# Altium PCB PCB2.PcbDoc
Units mil, origin at the board's own origin, x right, y up, seen from the top; angles counter-clockwise.
Board outline 1525 x 1550 mil, 2 copper layers (Top Layer, Bottom Layer); 17 components, 16 nets, 60 pads, 14 vias.
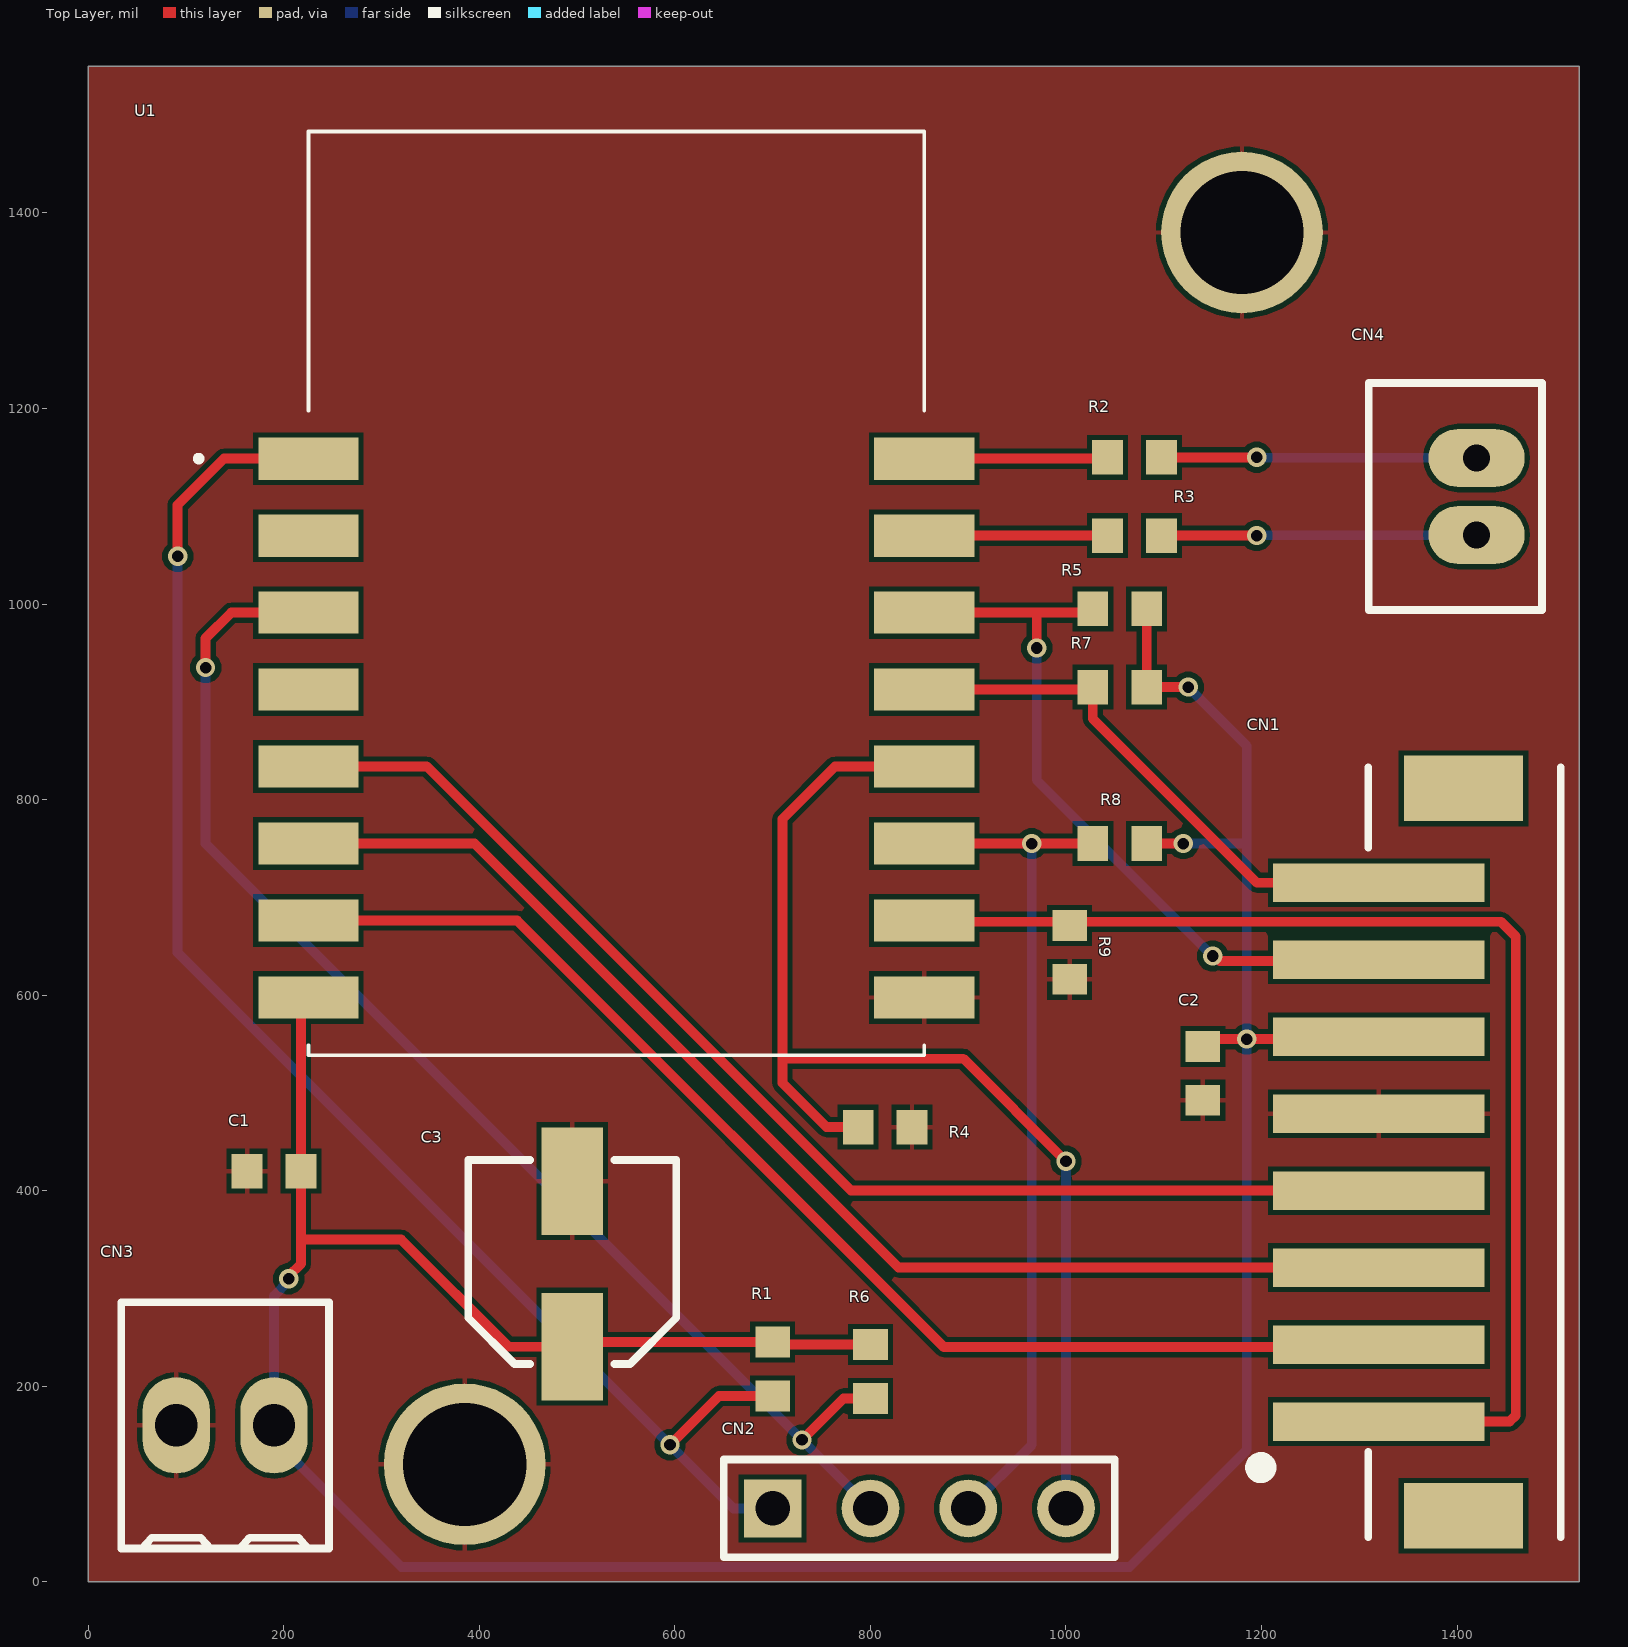
[diagram p0: Top Layer view]
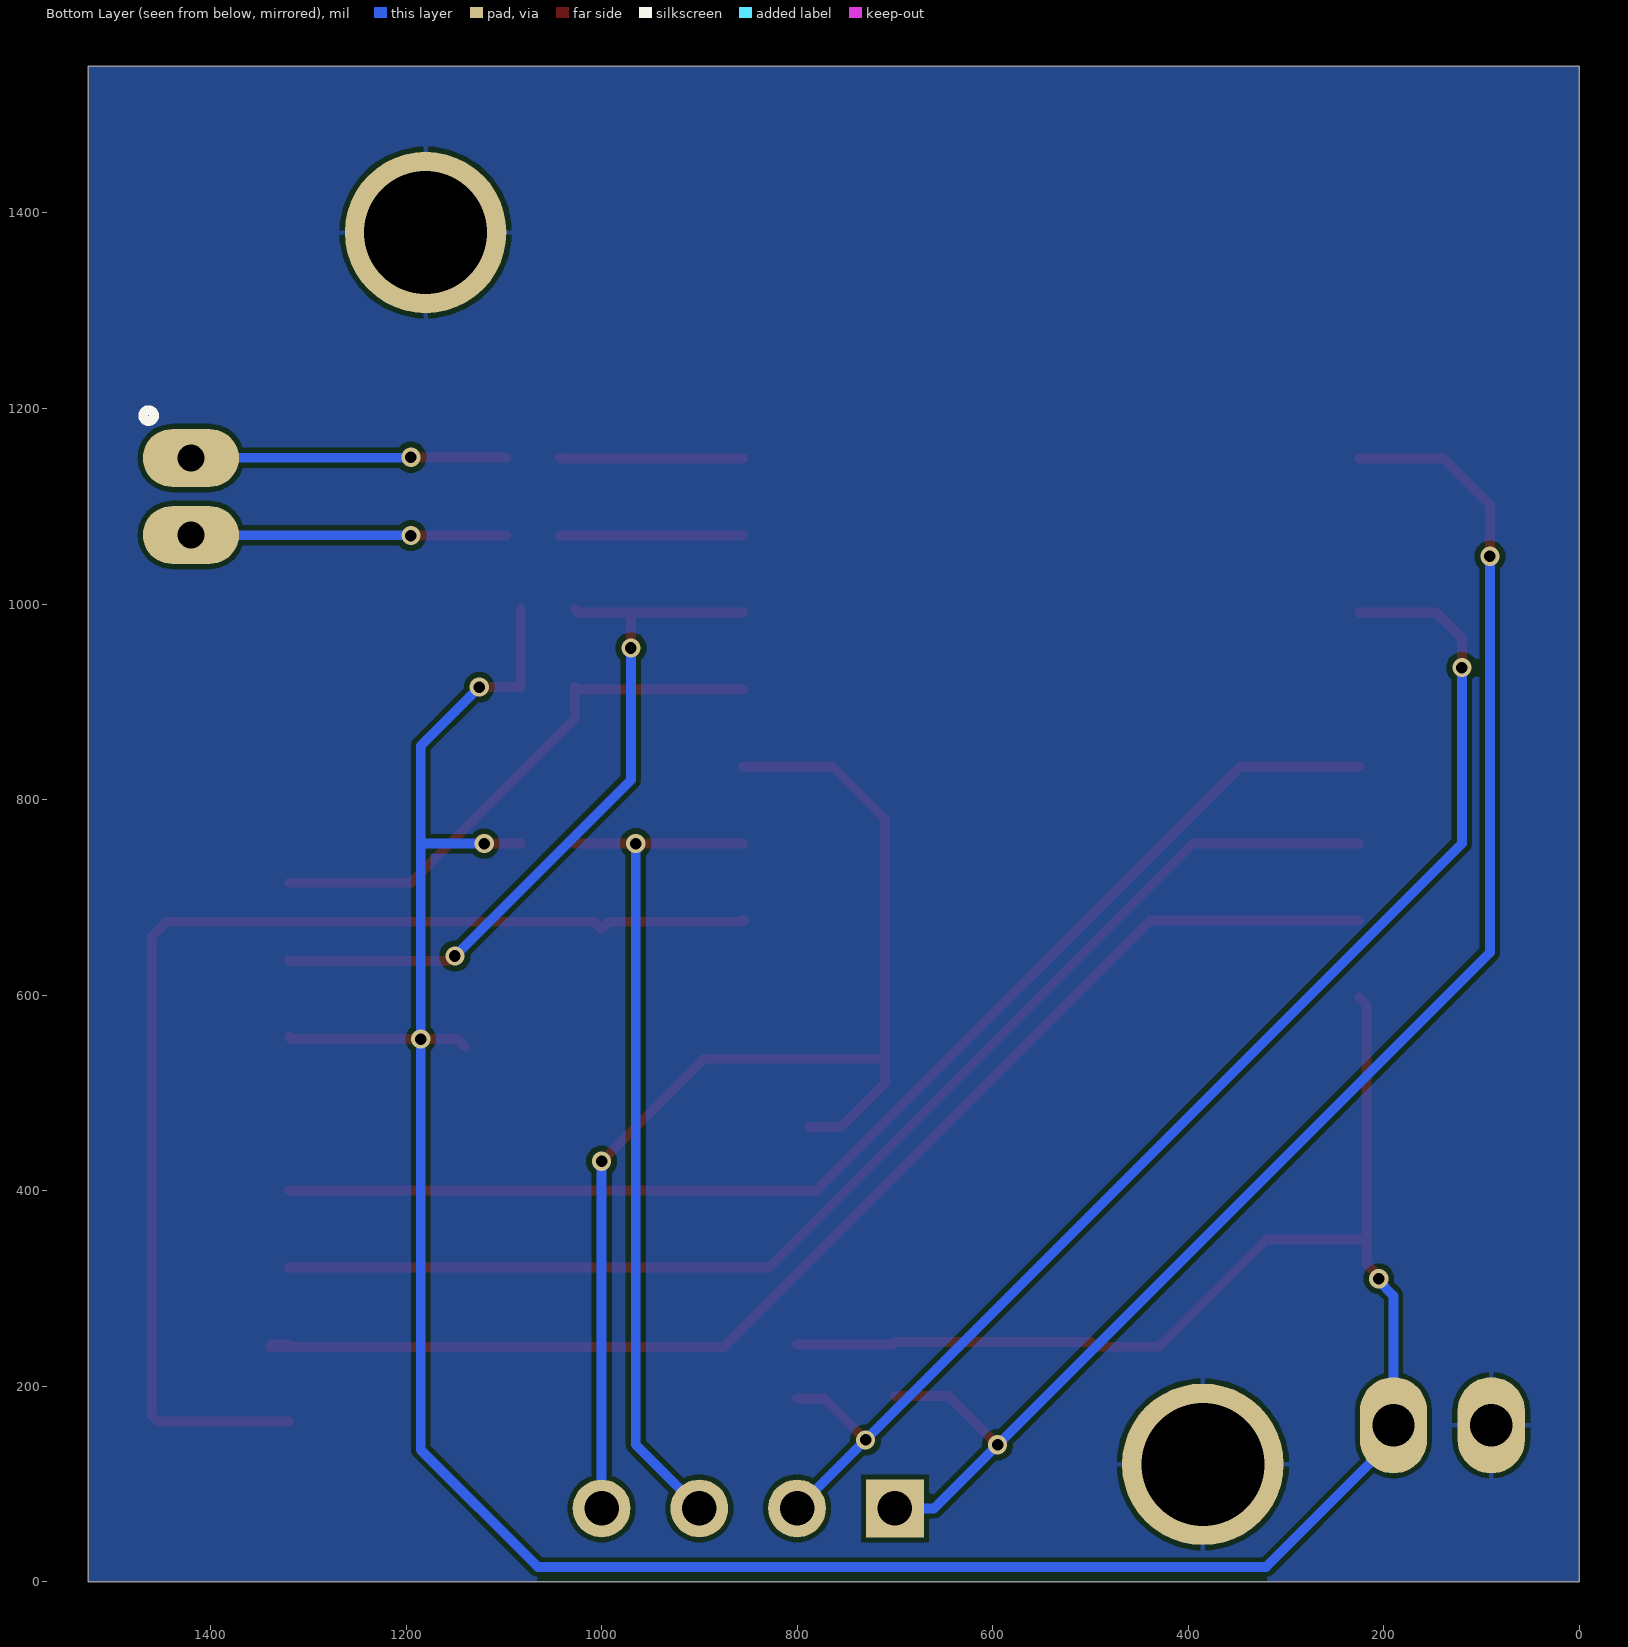
[diagram p1: Bottom Layer view, seen from below]

## Layer stack, top to bottom
Top Solder: solder mask 0.4, Solder Resist, Dk 3.5
Top Layer: signal copper 1.4
Dielectric 1: dielectric 12.6, FR-4, Dk 4.8
Bottom Layer: signal copper 1.4
Bottom Solder: solder mask 0.4, Solder Resist, Dk 3.5

## Board outline
0,0 0,1550 1525,1550 1525,260 1525,0

## Design rules (kind name [scope] priority, off if disabled: settings)
BoardOutlineClearance [All] p1: gap=7.87 ignorepadtopadclearanceinfootprint=FALSE
Clearance [All] p1: gap=5 ignorepadtopadclearanceinfootprint=FALSE except(9.84: Arc-Hole Track-Hole SMDPad-Hole THPad-Hole Via-Hole Fill-Hole Poly-Hole Region-Hole Text-Hole)
ComponentClearance [All] p1: gap=5 collisioncheckmode=3 verticalgap=5 showdistances=TRUE
DiffPairsRouting [All] p1: maxlimit=10 minlimit=5 mostfreqgap=5 toplayer_minwidth=5 toplayer_maxwidth=1000 toplayer_prefwidth=5 bottomlayer_minwidth=5 bottomlayer_maxwidth=1000 bottomlayer_prefwidth=5 maxuncoupledlength=500
Height [All] p1: minheight=0 maxheight=71497.94 prefheight=500
HoleSize [All] p1: absolutevalues=TRUE maxlimit=248.03 minlimit=5.91 maxpercent=80.000 minpercent=20.000
HoleToHoleClearance [All] p1: gap=19.68 allowstackedmicrovias=FALSE
MinimumAnnularRing [All] p1: minimumring=3
MinimumSolderMaskSliver [All] p1: minsoldermaskwidth=0
PlaneClearance [All] p1: clearance=5
PlaneConnect PlaneConnectPowerPads [InPadClass('PowerPads')] p1: planeconnectstyle=Direct reliefexpansion=20 reliefentries=4 reliefconductorwidth=10 reliefairgap=10
PlaneConnect [All] p2: pad.planeconnectstyle=Relief pad.reliefexpansion=11.81 pad.reliefentries=4 pad.reliefconductorwidth=5 pad.reliefairgap=5 via.planeconnectstyle=Direct via.reliefexpansion=11.81 via.reliefentries=4 via.reliefconductorwidth=5 via.reliefairgap=5
PolygonConnect PolygonConnectPowerPads [All vs (InPadClass('PowerPads'))] p1: connectstyle=Direct reliefconductorwidth=10 reliefentries=4 polygonreliefangle="90 Angle" airgapwidth=10
PolygonConnect [All] p2: thpad.connectstyle=Relief thpad.reliefconductorwidth=5 thpad.reliefentries=4 thpad.polygonreliefangle="90 Angle" thpad.airgapwidth=5 smdpad.connectstyle=Relief smdpad.reliefconductorwidth=5 smdpad.reliefentries=4 smdpad.polygonreliefangle="90 Angle" smdpad.airgapwidth=5 via.connectstyle=Direct via.reliefconductorwidth=5 via.reliefentries=4 via.polygonreliefangle="90 Angle" via.airgapwidth=5
RoutingVias [All] p1: holewidth=11.81 width=19.68 viastyle="Through Hole" minholewidth=11.81 minwidth=19.68 maxholewidth=11.81 maxwidth=19.68
SilkToSilkClearance [All] p1: silktosilkclearance=0
SilkToSolderMaskClearance [IsPad] p1: minsilkscreentomaskgap=5 clearancetoexposedcopper=TRUE
SolderMaskExpansion [All] p1: expansion=2.95 istentingtop=FALSE
Width [All] p1: maxlimit=1000 minlimit=5 preferedwidth=5 minimp=50.000000 maximp=50.000000 favimp=50.000000
20 further rules are at their usual default settings.

## Components (designator, comment, footprint, x,y, rotation, side; value= is the part's Value field where it differs from the comment)
C1 "Cap" 1608[0603] 190,420 r180 top value=100nF
C2 "Cap" 1608[0603] 1140,520 r270 top value=100nF
C3 "100µF" "CAP ALSMD POLY 5.3MM H6.0MM" 495,325 r90 top
CN1 "B8B-PH-SM4-TB_LF__SN_" B8B-PH-SM4-TB 1320,321.26 r270 top
CN2 "Header 4" HDR1X4 700,75 r0 top
CN3 "282834-2" "TE 282834-2" 140,160 r180 top
CN4 "B2B-PH-K-S(LF)(SN)" "JST B2B-PH-K" 1420,1110 r270 top
R1 "Res1" 1608[0603] 700,217.56 r90 top value=10k
R2 "Res1" 1608[0603] 1070,1150 r180 top value=100R
R3 "Res1" 1608[0603] 1070,1070 r180 top value=100R
R4 "Res1" 1608[0603] 815,465 r0 top value=10k
R5 "Res1" 1608[0603] 1055,995 r0 top value=4k7
R6 "Res1" 1608[0603] 800,215 r90 top value=10k
R7 "Res1" 1608[0603] 1055,915 r0 top value=4k7
R8 "Res1" 1608[0603] 1055,755 r0 top value=10k
R9 "Res1" 1608[0603] 1003.72,643.72 r270 top value=10k
U1 "ESP-12S" ESP12S 540.04,1010.94 r0 top

## Footprints (in the part's own frame and the unit in brackets; to place one, negate y for a bottom-side part, rotate by r counter-clockwise, add the part's x,y. Pads: shape width x height; smd on the part's side, far side on the other; paste and mask are expansions set on the pad)
1608[0603] [mm] "Chip Capacitor, Body 1.6x0.8mm, IPC High Density"
  rect 0.8x0.9 smd: 1(-0.7,0) 2(0.7,0)
  body extent -0.87,-0.48 0.87,0.48, height 1.3
B8B-PH-SM4-TB [mm]
  rect 1x5.5 smd: 1(4,0) 2(2,0) 3(0,0) 4(-2,0) 5(-4,0) 6(-6,0) 7(-8,0) 8(-10,0)
  rect 1.7x3.1 smd: 9(-12.45,2.2) 10(6.45,2.2)
  silkscreen extent -13,-3.27 7,4.72, body extent -12.97,-2.67 6.98,4.33, height 6.73
"CAP ALSMD POLY 5.3MM H6.0MM" [mm] "Aluminum Polymer Capacitor, Body 5.30x5.30x6.0mm, IPC Medium Density"
  rect 2.8x1.6 smd: 1(-2.15,0) 2(2.15,0)
  silkscreen extent -2.6,-2.7 2.7,2.7, body extent -2.95,-2.7 2.95,2.7, height 6
ESP12S [mm]
  rect 2.6x1.1 smd: 1(-8,3.5) 2(-8,1.5) 3(-8,-0.5) 4(-8,-2.5) 5(-8,-4.5) 6(-8,-6.5) 7(-8,-8.5) 8(-8,-10.5) 9(8,-10.5) 10(8,-8.5) 11(8,-6.5) 12(8,-4.5) 13(8,-2.5) 14(8,-0.5) 15(8,1.5) 16(8,3.5)
  silkscreen extent -10.9,-12 8,12, body extent -8,-12 8,12, height 3.1
HDR1X4 [mm] "Connector; Header; 4 Position"
  rect 1.5x1.5 hole 0.9: 1(0,0)
  round 1.5 hole 0.9: 2(2.54,0) 3(5.08,0) 4(7.62,0)
  silkscreen extent -1.27,-1.27 8.89,1.27
"JST B2B-PH-K" [mm]
  oval 1.5x2.5 hole 0.7: 1(-1,0) 2(1,0)
  silkscreen extent -2.95,-2.8 2.95,1.7, body extent -2.95,-2.8 2.95,1.7, height 6
"TE 282834-2" [mm]
  oval 1.75x2.5 hole 1.1: 1(-1.27,0) 2(1.27,0)
  silkscreen extent -2.7,-3.2 2.7,3.2, body extent -2.77,-3.25 2.77,3.25, height 10

## Part data
C1 C2: "Capacitor", LatestRevisionDate=17-Jul-2002, LatestRevisionNote="Re-released for DXP Platform.", PackageDescription="Radial Cap, Thru-Hole; 2 Leads; 0.3 in Pin Spacing", PackageReference=RAD-0.3, Published=8-Jun-2000, Publisher="Altium Limited"
C3: library part 6SVPC100M, "CAP ALUM POLY 100UF 20% 6.3V SMD", Device Package="Radial, Can - SMD", ESR (Equivalent Series Resistance)=30mOhm, Lifetime @ Temp.="2000 Hrs @ 105°C", manufacturer="Panasonic Electronic Components", Operating Temperature="-55°C ~ 105°C", Ripple Current @ High Frequency="2.15A @ 100kHz", Ripple Current @ Low Frequency="107.5mA @ 120Hz", Supplier Part Number 1=P16606CT-ND, Tolerance=±20%, Voltage - Rated=6.3V, Applications="General Purpose", Capacitance=100µF, componentlink1description=Datasheet, componentlink1url=https://industrial.panasonic.com/cdbs/www-data/pdf/AAB8000/AAB8000C256.pdf, componentlink2description="DigiKey Link", componentlink2url=http://digikey.com/product-detail/en/panasonic-electronic-components/6SVPC100M/P16606CT-ND/4204442, Height - Seated (Max)="0.236\" (6.00mm)", lastupdated="9/2/2020 1:22:07 AM", Lifecycle Status=Active, Minimum Order=1, Mounting Type="Surface Mount", Package / Case="Radial, Can - SMD", packaging=TapeAndReel, Part Number=6SVPC100M, Part Status=Active, partid=1943, price=0.51, series="OS-CON™, SVPC", Size / Dimension="0.197\" Dia (5.00mm)", Supplier 1=DigiKey, Surface Mount Land Size="0.209\" L x 0.209\" W (5.30mm x 5.30mm)", Type=Polymer
CN1: "Connector", Arrow Part Number=B8B-PH-SM4-TB(LF)(SN), Manufacturer_Name="JST (JAPAN SOLDERLESS TERMINALS)", Arrow Price/Stock=https://www.arrow.com/en/products/b8b-ph-sm4-tb-lf-sn/jst-manufacturing?region=europe, Datasheet Link=http://uk.rs-online.com/web/p/products/6881347, Manufacturer_Part_Number=B8B-PH-SM4-TB(LF)(SN)
CN2: "Header, 4-Pin", LatestRevisionDate=17-Jul-2002, LatestRevisionNote="Re-released for DXP Platform.", Publisher="Altium Limited"
CN3: "TERM BLK 2P SIDE ENT 2.54MM PCB", Color=Green, Current=10A, manufacturer="TE Connectivity AMP Connectors", Supplier Part Number 1=A98333-ND, Voltage=150V, componentlink1description=Datasheet, componentlink1url=https://www.te.com/commerce/DocumentDelivery/DDEController?Action=srchrtrv&DocNm=282834&DocType=Customer+Drawing&DocLang=English, componentlink2description="DigiKey Link", componentlink2url=http://digikey.com/product-detail/en/te-connectivity-amp-connectors/282834-2/A98333-ND/1150135, lastupdated="1/15/2020 4:15:38 AM", Lifecycle Status=Active, Mating Orientation="Horizontal with Board", Minimum Order=1, Mounting Type="Through Hole", Number of Levels=1, packaging=Bulk, Part Number=282834-2, Part Status=Active, Pitch="0.100\" (2.54mm)", Positions Per Level=2, price=0.88, series=Buchanan, Supplier 1=DigiKey, Wire Gauge="16-30 AWG", Wire Termination="Screw - Rising Cage Clamp"
CN4: "CONN HEADER VERT 2POS 2MM", Current Rating (Amps)=2A, Insulation Color=Natural, manufacturer="JST Sales America Inc.", Material Flammability Rating="UL94 V-0", Operating Temperature="-25°C ~ 85°C", Supplier Part Number 1=455-1704-ND, Voltage Rating=100V, componentlink1description=Datasheet, componentlink1url=http://www.jst-mfg.com/product/pdf/eng/ePH.pdf, componentlink2description="DigiKey Link", componentlink2url=http://digikey.com/product-detail/en/jst-sales-america-inc/B2B-PH-K-S-LF-SN/455-1704-ND/926611, Connector Type=Header, Contact Finish - Mating=Tin, Contact Finish - Post=Tin, Contact Length - Mating="0.130\" (3.30mm)", Contact Length - Post="0.134\" (3.40mm)", Contact Material=Brass, Contact Shape=Square, Contact Type="Male Pin", Fastening Type="Detent Lock", Insulation Height="0.236\" (6.00mm)", Insulation Material="Polyamide (PA66), Nylon 6/6", lastupdated="1/3/2020 11:40:58 PM", Lifecycle Status=Active, Minimum Order=1, Mounting Type="Through Hole", Number of Positions=2, Number of Positions Loaded=All, Number of Rows=1, Overall Contact Length="0.333\" (8.45mm)", packaging=Bulk, Part Number=B2B-PH-K-S(LF)(SN), Part Status=Active, partid=11, Pitch - Mating="0.079\" (2.00mm)", price=0.17, series=PH, Shrouding="Shrouded - 4 Wall", Style="Board to Cable/Wire", Supplier 1=DigiKey, Termination="Press-Fit, Solder"
R1 R2 R3 R4 R5 R6 R7 R8 R9: "Resistor", LatestRevisionDate=17-Jul-2002, LatestRevisionNote="Re-released for DXP Platform.", PackageDescription="Axial Device, Thru-Hole; 2 Leads; 0.3 in Pin Spacing", PackageReference=AXIAL-0.3, Published=8-Jun-2000, Publisher="Altium Limited"
U1: "Integrated Circuit", Manufacturer_Name="RF SOLUTIONS", Mouser Part Number=223-ESP-12S, Datasheet Link=https://datasheet.datasheetarchive.com/originals/distributors/DKDS42/DSANUWW0049619.pdf, Height=3mm, Manufacturer_Part_Number=ESP-12S, Mouser Price/Stock=https://www.mouser.co.uk/ProductDetail/RF-Solutions/ESP-12S?qs=UkDUCjYnTB27YArJ5wHUxg%3D%3D

## Free pads (board coordinates)
  round 165.35 hole 125.98: 2(385,120) 2(1180,1380)

## Via types
v1: diameter 19.68, hole 11.81, Top Layer to Bottom Layer, 14 vias

## Nets (pads, with @x,y where several pads share a name; then routed paths per layer and width w, separated by ;. In a path a pad name is that pad's centre, name@x,y a point inside that pad or via, vN(x,y) a via of type N, cw(c..) or ccw(c..) an arc to the next point about the centre after c; other vN are vias at no path point)
3V3: C1.1 C2.1 C3.1 CN1.6 CN3.1 R1.2 R5.2 R6.2 R7.2 R8.2 U1.8 | length 3410.2
  Top Layer w10: v1(205,310) 205,312.62 217.56,325.18 217.56,350 ; U1.8 217.56,590.04 C1.1 217.56,350 ; R6.2 702.56,242.56 R1.2 499.76,245.12 C3.1 429.65,240.35 320,350 217.56,350 ; R8.2 v1(1120,755) ; R5.2 R7.2 v1(1125,915) ; C2.1 1147.44,555 v1(1185,555) 1317.52,555 CN1.6
  Bottom Layer w10: v1(205,310) 205,307.38 190,292.38 CN3.1 190,145.24 320.24,15 1065,15 1185,135 v1(1185,555) 1185,755 ; v1(1120,755) 1185,755 ; v1(1125,915) 1185,855 1185,755
CAM_CS: CN1.1 R9.1 U1.10 | length 1253.1
  Top Layer w10: U1.10 853.7,676.3 855,675 992.56,675 1000,667.56 1007.44,675 1445,675 1460,660 1460,170 1453.78,163.78 CN1.1
CAM_MISO: CN1.3 U1.6 | length 1274.6
  Top Layer w10: U1.6 394.96,755.04 828.74,321.26 CN1.3
CAM_MOSI: CN1.2 U1.7 | length 1316.7
  Top Layer w10: U1.7 438.7,676.3 875,240 1340,240 1337.48,242.52 CN1.2
CAM_SCK: CN1.4 U1.5 | length 1274.6
  Top Layer w10: U1.5 346.22,833.78 780,400 CN1.4
CAM_SCL: CN1.8 R7.1 U1.13 | length 567.9
  Top Layer w10: U1.13 1024.96,912.52 R7.1 1027.44,882.56 1195.04,714.96 CN1.8
CAM_SDA: CN1.7 R5.1 U1.14 | length 772.4
  Top Layer w10: U1.14 970,991.26 ; v1(970,955) 970,991.26 ; R5.1 1023.7,991.26 970,991.26 ; v1(1150,640) 1152.62,640 1157.62,635 1318.78,635 CN1.7
  Bottom Layer w10: v1(970,955) 970,820 v1(1150,640)
EN: CN2.2 R6.1 U1.3 | length 1375.2
  Top Layer w10: v1(120,935) 120,965 146.26,991.26 U1.3 ; v1(730,145) 772.44,187.44 R6.1
  Bottom Layer w10: v1(120,935) 120,755 v1(730,145) CN2.2
ESP_RX: CN4.1 R2.1 | length 322.7
  Top Layer w10: R2.1 v1(1195,1150)
  Bottom Layer w10: v1(1195,1150) 1195.31,1149.69 1419.68,1149.69 CN4.1
ESP_TX: CN4.2 R3.1 | length 322.7
  Top Layer w10: R3.1 v1(1195,1070)
  Bottom Layer w10: v1(1195,1070) 1195.32,1070.32 1419.69,1070.32 CN4.2
GND: C1.2 C2.2 C3.2 CN1.5 CN3.2 pad.2 R4.2 R9.2 U1.9
GPIO0: CN2.4 R4.1 U1.12 | length 1221.8
  Top Layer w10: R4.1 755,465 710,510 710,535 ; U1.12 763.78,833.78 710,780 710,535 ; v1(1000,430) 895,535 710,535
  Bottom Layer w10: CN2.4 v1(1000,430)
GPIO2: CN2.3 R8.1 U1.11 | length 879.4
  Top Layer w10: U1.11 R8.1 R8.1
  Bottom Layer w10: CN2.3 965,140 v1(965,755)
NetR2_2: R2.2 U1.16 | length 188
  Top Layer w10: U1.16 1041.18,1148.74 R2.2
NetR3_2: R3.2 U1.15 | length 187.4
  Top Layer w10: U1.15 R3.2
RST: CN2.1 R1.1 U1.1 | length 1580.9
  Top Layer w10: v1(91.39,1048.77) 91.39,1101.39 138.74,1148.74 U1.1 ; v1(595,140) 645,190 R1.1
  Bottom Layer w10: v1(91.39,1048.77) 91.39,643.61 v1(595,140) 660,75 CN2.1
pads on no net: CN1.9 CN1.10 U1.2 U1.4

## Polygon pours and split planes (outlines as drawn)
GND on Top Layer "VDDA" (solid, pour order 0): 0,0 1525,0 1525,1550 0,1550
GND on Bottom Layer "VDDA" (solid, pour order 1): 0,1550 1525,1550 1525,0 0,0

## Silkscreen, mask and mechanical layers (free items; w line width, h text height)
Mechanical 13:
  lines w1: 0,0 0,1550 1525,1550 1525,260 1525,0 675,0 0,0